# Altium PCB PCB1-C.PcbDoc (part 3 of 4)
Units mil, origin at the board's own origin, x right, y up, seen from the top; angles counter-clockwise.
Board outline 2476.38 x 3779.53 mil, 2 copper layers (Top Layer, Bottom Layer); 106 components, 105 nets, 404 pads, 256 vias.
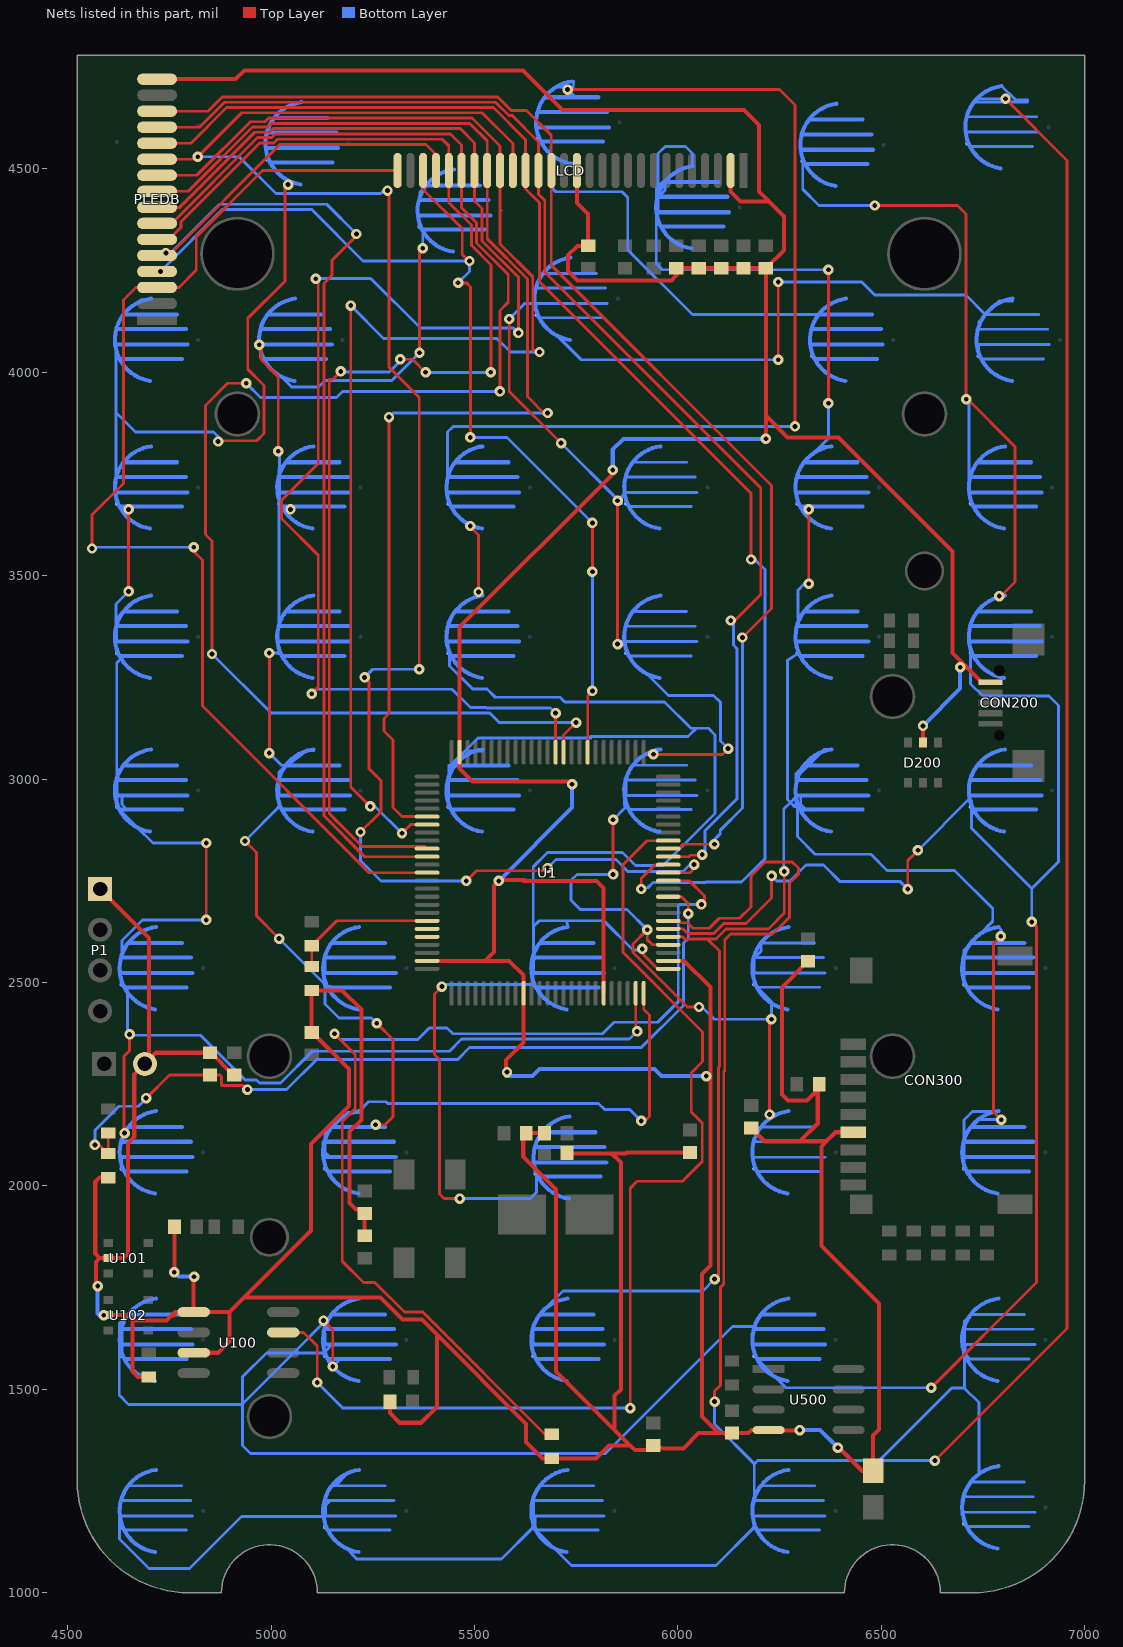
[diagram p3: the nets of this part, all layers, seen from the top]

## Footprints (in the part's own frame and the unit in brackets; to place one, negate y for a bottom-side part, rotate by r counter-clockwise, add the part's x,y. Pads: shape width x height; smd on the part's side, far side on the other; paste and mask are expansions set on the pad) (continued)
Button#44 [mil]
  round 10 smd: 1(120,0) 2(320,-40)
  Top Layer lines w10: 320.19,-12 319,-12 307.9,-12 303,-12 146,-12 ; 319,26 150,26 ; 312,-47 311.7,-47 295.1,-47 160,-47 ; 304,6 131.7,6 130.7,6 127,6 126,6 ; 303,62 301,62 195.54,62 172,62 ; 291,-30 131.7,-30 130.7,-30 127.7,-30 127,-30 ; 287,44 144.9,44 134,44 ; 268,-65 227.7,-65 149,-65 ; 238.02,-101.12 ccw(c222.55,-0.14) 313.67,-46.33 ccw(c222.55,-0.14) 314.37,-44.93 ccw(c222.55,-0.14) 324.6,4.7 ccw(c222.55,-0.14) 321.31,26 ccw(c222.55,-0.14) 320.19,29.92 ccw(c222.55,-0.14) 319,33.55 ccw(c222.55,-0.14) 309.5,53.5 ccw(c222.55,-0.14) 305.5,59.5 ccw(c222.55,-0.14) 276.18,86.82 ccw(c222.55,-0.14) 249.89,98.3 ccw(c222.55,-0.14) 235.89,101.15 ; 211.96,-101.38 cw(c223.45,0.14) 144.74,-65 cw(c223.45,0.14) 135.01,-51.01 cw(c223.45,0.14) 130.7,-42.7 cw(c223.45,0.14) 126,-30.53 cw(c223.45,0.14) 125.33,-28.33 cw(c223.45,0.14) 125.06,-27.36 cw(c223.45,0.14) 121.29,1.29 cw(c223.45,0.14) 121.46,6 cw(c223.45,0.14) 127,33.82 cw(c223.45,0.14) 128.95,38.95 cw(c223.45,0.14) 131.18,44 cw(c223.45,0.14) 208.82,101.24
Button#45 [mil]
  round 10 smd: 1(120,0) 2(320,-40)
  Top Layer lines w10: 320.19,-12 300.6,-12 298.3,-12 146,-12 ; 319,26 150,26 ; 312,-47 297.4,-47 160,-47 ; 304,6 134.5,6 130.5,6 127,6 126,6 ; 303,62 172,62 ; 291,-30 134.5,-30 130.5,-30 127,-30 ; 287,44 147,44 134,44 ; 268,-65 154.12,-65 149,-65 ; 238.02,-101.12 ccw(c222.55,-0.14) 313.33,-47 ccw(c222.55,-0.14) 317.11,-38.82 ccw(c222.55,-0.14) 319.29,-32.99 ccw(c222.55,-0.14) 324.43,-7.76 ccw(c222.55,-0.14) 322.08,22.92 ccw(c222.55,-0.14) 303.36,62.36 ccw(c222.55,-0.14) 235.89,101.15 ; 211.95,-101.38 cw(c223.45,0.14) 182.65,-93.53 cw(c223.45,0.14) 146.7,-67.3 cw(c223.45,0.14) 144.74,-65 cw(c223.45,0.14) 123,-18.5 cw(c223.45,0.14) 121.53,-6.97 cw(c223.45,0.14) 121.29,1.29 cw(c223.45,0.14) 121.46,6 cw(c223.45,0.14) 127,33.82 cw(c223.45,0.14) 128.95,38.95 cw(c223.45,0.14) 208.82,101.24
Button#46 [mil]
  round 10 smd: 1(120,0) 2(320,-40)
  Top Layer lines w7: 320.19,-12 319,-12 307.9,-12 146,-12 ; 319,26 150,26 ; 312,-47 296.3,-47 160,-47 ; 303,62 172,62
  Top Layer lines w10: 304,6 145.4,6 128.9,6 127,6 126,6 ; 291,-30 154.1,-30 146.9,-30 128.9,-30 127,-30 ; 287,44 143.1,44 134,44 ; 268,-65 149,-65 ; 238.02,-101.12 ccw(c222.55,-0.14) 313.33,-47 ccw(c222.55,-0.14) 320.19,29.92 ccw(c222.55,-0.14) 319,33.55 ccw(c222.55,-0.14) 305.5,59.5 ccw(c222.55,-0.14) 282.18,82.82 ccw(c222.55,-0.14) 235.89,101.15 ; 211.96,-101.38 cw(c223.45,0.14) 211.9,-101.37 cw(c223.45,0.14) 172.3,-88.3 cw(c223.45,0.14) 144.74,-65 cw(c223.45,0.14) 138.9,-57.21 cw(c223.45,0.14) 135.01,-51.01 cw(c223.45,0.14) 128.9,-38.56 cw(c223.45,0.14) 121.29,1.29 cw(c223.45,0.14) 121.46,6 cw(c223.45,0.14) 124.9,27.06 cw(c223.45,0.14) 126,30.81 cw(c223.45,0.14) 127,33.82 cw(c223.45,0.14) 128.95,38.95 cw(c223.45,0.14) 208.82,101.24
Button#47 [mil]
  round 10 smd: 1(120,0) 2(320,-40)
  Top Layer lines w10: 320.19,-12 320,-12 146,-12 ; 319,26 171.3,26 150,26 ; 312,-47 160,-47 ; 304,6 129.1,6 128.6,6 127,6 126,6 ; 303,62 301.6,62 300.49,62 172,62 ; 291,-30 130.9,-30 129.1,-30 127,-30 ; 287,44 142.8,44 134,44 ; 268,-65 149.1,-65 149,-65 ; 238.02,-101.12 ccw(c222.55,-0.14) 310.8,-51.6 ccw(c222.55,-0.14) 312,-49.49 ccw(c222.55,-0.14) 313.67,-46.33 ccw(c222.55,-0.14) 320,-30.81 ccw(c222.55,-0.14) 320.19,29.92 ccw(c222.55,-0.14) 320,30.53 ccw(c222.55,-0.14) 319,33.55 ccw(c222.55,-0.14) 310.29,52.21 ccw(c222.55,-0.14) 308.48,55.12 ccw(c222.55,-0.14) 305.5,59.5 ccw(c222.55,-0.14) 241.26,100.3 ccw(c222.55,-0.14) 235.89,101.15 ; 211.96,-101.38 cw(c223.45,0.14) 144.6,-64.82 cw(c223.45,0.14) 141.6,-61 cw(c223.45,0.14) 135.01,-51.01 cw(c223.45,0.14) 129.1,-39.05 cw(c223.45,0.14) 121.46,6 cw(c223.45,0.14) 126,30.8 cw(c223.45,0.14) 127,33.82 cw(c223.45,0.14) 128.6,38.09 cw(c223.45,0.14) 128.95,38.95 cw(c223.45,0.14) 129.1,39.32 cw(c223.45,0.14) 208.82,101.24
Button#48 [mil]
  round 10 smd: 1(120,0) 2(320,-40)
  Top Layer lines w10: 320.19,-12 319,-12 146,-12 ; 319,26 150,26 ; 312,-47 160,-47 ; 304,6 140.2,6 127.7,6 127.15,6 127,6 126,6 ; 303,62 290.2,62 172,62 ; 291,-30 140.2,-30 127.7,-30 127,-30 ; 287,44 140.2,44 137.7,44 134,44 ; 268,-65 227.7,-65 165.2,-65 149,-65 ; 238.02,-101.12 ccw(c222.55,-0.14) 313.33,-47 ccw(c222.55,-0.14) 317.6,-37.6 ccw(c222.55,-0.14) 322.98,18.58 ccw(c222.55,-0.14) 322.08,22.92 ccw(c222.55,-0.14) 305.5,59.5 ccw(c222.55,-0.14) 235.89,101.15 ; 211.96,-101.38 cw(c223.45,0.14) 211.7,-101.35 cw(c223.45,0.14) 169.67,-86.73 cw(c223.45,0.14) 155.49,-76.15 cw(c223.45,0.14) 144.74,-65 cw(c223.45,0.14) 135.01,-51.01 cw(c223.45,0.14) 127.7,-35.49 cw(c223.45,0.14) 127,-33.55 cw(c223.45,0.14) 121.99,-11.79 cw(c223.45,0.14) 121.89,-10.9 cw(c223.45,0.14) 121.29,0 cw(c223.45,0.14) 123.75,22.45 cw(c223.45,0.14) 127,33.82 cw(c223.45,0.14) 128.95,38.95 cw(c223.45,0.14) 208.82,101.24
Button#49 [mil]
  round 10 smd: 1(120,0) 2(320,-40)
  Top Layer lines w7: 320.19,-12 146,-12 ; 319,26 150,26 ; 312,-47 307,-47 306.7,-47 160,-47 ; 303,62 172,62
  Top Layer lines w10: 304,6 143.2,6 131.7,6 130.7,6 127,6 126,6 ; 291,-30 138.2,-30 131.7,-30 130.7,-30 127,-30 ; 287,44 152.7,44 140.2,44 134,44 ; 268,-65 149,-65 ; 211.96,-101.38 cw(c223.45,0.14) 211.7,-101.35 cw(c223.45,0.14) 144.74,-65 cw(c223.45,0.14) 135.01,-51.01 cw(c223.45,0.14) 130.7,-42.7 cw(c223.45,0.14) 127,-33.55 cw(c223.45,0.14) 122.28,-14.08 cw(c223.45,0.14) 121.7,-9.03 cw(c223.45,0.14) 121.35,3.65 cw(c223.45,0.14) 121.46,6 cw(c223.45,0.14) 121.7,9.31 cw(c223.45,0.14) 124.33,24.87 cw(c223.45,0.14) 124.82,26.75 cw(c223.45,0.14) 127,33.82 cw(c223.45,0.14) 128.95,38.95 cw(c223.45,0.14) 130.7,42.97 cw(c223.45,0.14) 130.73,43.03 cw(c223.45,0.14) 139.03,57.67 cw(c223.45,0.14) 207.22,101 cw(c223.45,0.14) 208.82,101.24 ; 324.71,-1.02 cw(c222.55,-0.14) 320.19,-30.19 ; 324.71,-1.02 cw(c222.55,-0.14) 320.19,-30.19 ; 324.71,-1.02 cw(c222.55,-0.14) 320.19,-30.19 ; 324.71,-1.02 cw(c222.55,-0.14) 320.19,-30.19 ; 324.71,-1.02 ccw(c222.55,-0.14) 319,33.55 ; 324.71,-1.02 ccw(c222.55,-0.14) 319,33.55 ; 324.71,-1.02 ccw(c222.55,-0.14) 319,33.55 ; 324.71,-1.02 ccw(c222.55,-0.14) 319,33.55 ; 320.19,-30.19 cw(c222.55,-0.14) 318.51,-35.19 ; 320.19,-30.19 cw(c222.55,-0.14) 318.51,-35.19 ; 320.19,-30.19 cw(c222.55,-0.14) 318.51,-35.19 ; 320.19,-30.19 cw(c222.55,-0.14) 318.51,-35.19 ; 319,33.55 ccw(c222.55,-0.14) 305.5,59.5 ; 319,33.55 ccw(c222.55,-0.14) 305.5,59.5 ; 319,33.55 ccw(c222.55,-0.14) 305.5,59.5 ; 319,33.55 ccw(c222.55,-0.14) 305.5,59.5 ; 318.51,-35.19 cw(c222.55,-0.14) 315.6,-42.32 ; 318.51,-35.19 cw(c222.55,-0.14) 315.6,-42.32 ; 318.51,-35.19 cw(c222.55,-0.14) 315.6,-42.32 ; 318.51,-35.19 cw(c222.55,-0.14) 315.6,-42.32 ; 315.6,-42.32 cw(c222.55,-0.14) 313.33,-47 ; 315.6,-42.32 cw(c222.55,-0.14) 313.33,-47 ; 315.6,-42.32 cw(c222.55,-0.14) 313.33,-47 ; 315.6,-42.32 cw(c222.55,-0.14) 313.33,-47 ; 313.33,-47 cw(c222.55,-0.14) 266.77,-92.23 ; 313.33,-47 cw(c222.55,-0.14) 266.77,-92.23 ; 313.33,-47 cw(c222.55,-0.14) 266.77,-92.23 ; 313.33,-47 cw(c222.55,-0.14) 266.77,-92.23 ; 305.5,59.5 ccw(c222.55,-0.14) 235.89,101.15 ; 305.5,59.5 ccw(c222.55,-0.14) 235.89,101.15 ; 305.5,59.5 ccw(c222.55,-0.14) 235.89,101.15 ; 305.5,59.5 ccw(c222.55,-0.14) 235.89,101.15 ; 266.77,-92.23 cw(c222.55,-0.14) 260.73,-94.89 ; 266.77,-92.23 cw(c222.55,-0.14) 260.73,-94.89 ; 266.77,-92.23 cw(c222.55,-0.14) 260.73,-94.89 ; 266.77,-92.23 cw(c222.55,-0.14) 260.73,-94.89 ; 260.73,-94.89 cw(c222.55,-0.14) 238.02,-101.12 ; 260.73,-94.89 cw(c222.55,-0.14) 238.02,-101.12 ; 260.73,-94.89 cw(c222.55,-0.14) 238.02,-101.12 ; 260.73,-94.89 cw(c222.55,-0.14) 238.02,-101.12
Button#50 [mil]
  round 10 smd: 1(120,0) 2(320,-40)
  Top Layer lines w10: 320.19,-12 309.8,-12 303.7,-12 146,-12 ; 319,26 306.2,26 150,26 ; 312,-47 305,-47 160,-47 ; 304,6 132,6 131,6 127,6 126,6 ; 303,62 172,62 ; 291,-30 132,-30 131,-30 128.5,-30 127,-30 ; 287,44 143.8,44 134,44 ; 268,-65 231.26,-65 149,-65 ; 238.02,-101.12 ccw(c222.55,-0.14) 313.33,-47 ccw(c222.55,-0.14) 324.6,4.63 ccw(c222.55,-0.14) 324.4,7.8 ccw(c222.55,-0.14) 320.19,29.92 ccw(c222.55,-0.14) 303.64,62 ccw(c222.55,-0.14) 235.89,101.15 ; 211.96,-101.38 cw(c223.45,0.14) 144.74,-65 cw(c223.45,0.14) 135.01,-51.01 cw(c223.45,0.14) 131,-43.34 cw(c223.45,0.14) 126,-30.53 cw(c223.45,0.14) 125.33,-28.33 cw(c223.45,0.14) 124.75,-26.25 cw(c223.45,0.14) 121.29,1.29 cw(c223.45,0.14) 121.46,6 cw(c223.45,0.14) 127,33.82 cw(c223.45,0.14) 128.95,38.95 cw(c223.45,0.14) 131.18,44 cw(c223.45,0.14) 208.82,101.24
CON_16P_1.0MM [mm]
  rect 2.5x0.7 smd: 1(0,0)
  oval 2.5x0.7 smd: 2(0,-1) 3(0,-2) 4(0,-3) 5(0,-4) 6(0,-5) 7(0,-6) 8(0,-7) 9(0,-8) 10(0,-9) 11(0,-10) 12(0,-11) 13(0,-12) 14(0,-13) 15(0,-14) 16(0,-15)
HDR1X2 [mm] "Connector; Header; 2 Position"
  rect 1.5x1.5 hole 0.9: 1(0,0)
  round 1.5 hole 0.9: 2(2.54,0)
  silkscreen extent -1.27,-1.27 3.81,1.27
HDR1X4 [mm] "Connector; Header; 4 Position"
  rect 1.5x1.5 hole 0.9: 1(0,0)
  round 1.5 hole 0.9: 2(2.54,0) 3(5.08,0) 4(7.62,0)
  silkscreen extent -1.27,-1.27 8.89,1.27
J1-0603 [mm] "Chip Resistor, Body 1.6x0.8mm, IPC High Density"
  rect 0.7x0.9 smd: 1(-0.75,0) 2(0.75,0)
  silkscreen extent -0.2,-0.35 0.2,0.35, body extent -0.85,-0.48 0.85,0.48, height 0.9
LCD_28P [mm]
  rect 2.2x0.5 smd: 1(0,0)
  oval 2.2x0.5 smd: 2(0,-0.8) 3(0,-1.6) 4(0,-2.4) 5(0,-3.2) 6(0,-4) 7(0,-4.8) 8(0,-5.6) 9(0,-6.4) 10(0,-7.2) 11(0,-8) 12(0,-8.8) 13(0,-9.6) 14(0,-10.4) 15(0,-11.2) 16(0,-12) 17(0,-12.8) 18(0,-13.6) 19(0,-14.4) 20(0,-15.2) 21(0,-16) 22(0,-16.8) 23(0,-17.6) 24(0,-18.4) 25(0,-19.2) 26(0,-20) 27(0,-20.8) 28(0,-21.6)
SM8 [mm]
  rect 1.9x1.3 smd: 1(-2.75,-1.6) 2(2.75,-1.6) 3(2.75,1.6) 4(-2.75,1.6)
  silkscreen extent -4.44,-1.91 4.44,1.91
SO-8 [mil]
  oval 80x24 smd: 1(0,0) 2(0,-50) 3(0,-100) 4(0,-150) 5(220,-150) 6(220,-100) 7(220,-50) 8(220,0)
  silkscreen extent 60,-175 160,25
SOIC8 [mm]
  rect 2x0.5 smd: 1(0,0)
  oval 2x0.5 smd: 2(0,-1.27) 3(0,-2.54) 4(0,-3.81) 5(5,-3.81) 6(5,-2.54) 7(5,-1.27) 8(5,0)
  silkscreen extent 1.27,-4.44 3.68,0.64
SOT-23-5 [mm]
  rect 0.6x0.5 smd: 1(0,0) 2(0,-0.95) 3(0,-1.9) 4(2.5,-1.9) 5(2.5,0)
  silkscreen extent 0.63,-2.38 1.87,0.48
SOT-23-6 [mm]
  rect 0.6x0.5 smd: 1(0,0) 2(0,-0.95) 3(0,-1.9) 4(2.5,-1.9) 5(2.5,-0.95) 6(2.5,0)
  silkscreen extent 0.63,-2.38 1.87,0.48
TF-2 [mm]
  rect 1.4x1.2 smd: 0(-4.55,-7.75)
  rect 1.4x1.6 smd: 0(-4.55,6.85)
  rect 2.2x1.2 smd: 0(5.05,-7.75) 0(5.05,7.75)
  rect 1.6x0.7 smd: 1(-5.05,2.25) 2(-5.05,1.15) 3(-5.05,0.05) 4(-5.05,-1.05) 5(-5.05,-2.15) 6(-5.05,-3.25) 7(-5.05,-4.35) 8(-5.05,-5.45) 9(-5.05,-6.55)
  silkscreen extent -3.94,-6.88 9.47,6.86
USB-MICRO [mm]
  rect 0.35x1.5 smd: 1(-1.3,2.675) 5(1.3,2.675)
  rect 0.4x1.5 smd: 2(-0.65,2.675) 3(0,2.675) 4(0.65,2.675)
  round 0.7 hole 0.7 unplated: 6(-2.032,2.134) 7(2.032,2.134)
  rect 2x2 smd: 8(-3.95,0.3) 9(3.95,0.3)
  silkscreen extent -3.68,-3 3.75,-2

## Part data
BAT: "Header, 2-Pin"
C8 C9 C10 C11 C12 C13 C14 C15 C16 C17 C18 C100 C101 C102 C400 C401 C402 C403 C404 C405 C406 C407 C500: library part "Cap Semi", "Capacitor (Semiconductor SIM Model)"
C19: library part EC
L200: library part BEAD__FERRITE, "EMI Suppression Filters,2A,0805"
P1: "Header, 4-Pin"
PLEDB: "Header, 16-Pin"
R1 R6 R7 R12 R102 R103 R104 R105 R200 R201 R202 R300 R301 R302 R303 R304 R500: library part Res3, "Resistor"
U1: "ARM Cortex-M3 Microcontroller"
U500: library part W25X16
X3: library part MC306

## Free pads (board coordinates)
  round 112.2 hole 98.43: 0(4917.32,3897.64) 0(4996.06,1433.07) 0(4996.06,2318.9) 0(6527.56,2318.9) 0(6527.56,3203.07) 0(6606.3,3897.64)
  round 183.07 hole 169.29: 0(4917.32,4291.34) 0(6606.3,4291.34)
  round 96.46 hole 82.68: 0(4996.06,1874.02) 0(6606.3,3511.81)

## Via types
v1: diameter 25.59, hole 11.81, Top Layer to Bottom Layer, tented both sides, 253 vias
v2: diameter 39.37, hole 39.37, Top Layer to Bottom Layer, tented both sides, 2 vias
v3: diameter 25.59, hole 11.81, Top Layer to Bottom Layer, 1 vias

## Nets (pads, with @x,y where several pads share a name; then routed paths per layer and width w, separated by ;. In a path a pad name is that pad's centre, name@x,y a point inside that pad or via, vN(x,y) a via of type N, cw(c..) or ccw(c..) an arc to the next point about the centre after c; other vN are vias at no path point)
ADC12_IN8: C102.2 R104.2 R105.1 U1.35 | length 2056.4
  Top Layer w7: v1(4567,2101) 4578.53,2101 R104.2@4600,2079.53 R105.1@4600,2130.47 ; v1@4693.5,2215.5 4750.44,2272.44 C102.2@4850,2272.44 4875,2272.44 4878,2269.44 4878,2248 4879,2247 4932,2247 v1(4942,2237) ; U1.35@5976.26,2710.94 6009.06,2710.94 6025.5,2694.5 v1(6025.5,2669.5)
  Bottom Layer w7: v1(4567,2101) 4567,2137 4626,2196 4674,2196 v1@4693.5,2215.5 ; v1(4942,2237) 5038.29,2237 5112.29,2311 5458.87,2311 5487.9,2340.03 5910.25,2340.03 6014,2443.78 6014,2597.5 6025.5,2609 v1(6025.5,2669.5)
  other v1: 4693,2216
BOOT0: R6.1 R7.2 U1.94 | length 360.1
  Top Layer w7: R7.2@5100,2539.53 R6.1@5100,2590.47 5161.42,2651.89 U1.94@5383.74,2651.89
BOOT1: R12.1 U1.37 | length 2608.5
  Top Layer w7: v1(5156,2374) 5207,2323 5207,2190.49 5175,2158.49 5175,1815 5227.15,1762.85 5255.15,1762.85 5328,1690 5373,1690 5673.47,1389.53 R12.1@5690,1389.53 ; U1.37@5976.26,2750.32 6028,2750.32 6065.3,2713.02 6065.3,2699.3 v1(6058,2692)
  Bottom Layer w7: v1(5156,2374) 5170,2360 5360.7,2360 5389,2388.3 5432.8,2388.3 5447.09,2374 5815,2374 5843.3,2402.3 5950.5,2402.3 6001,2452.8 6001,2688.8 6004.2,2692 v1(6058,2692)
CHRG: U1.42 U100.7 | length 2696.5
  Top Layer w7: U100.7@5030,1640 5080,1640 5113.5,1606.5 v1(5113.5,1517) ; v1(5883,1454) 5883,1994.5 5900,2011.5 6011.5,2011.5 6060,2060 6060,2154.46 6033,2181.46 6033,2277.62 6061,2305.62 6061,2378.38 5865.04,2574.34 5865.04,2789.78 5924,2848.74 U1.42@5976.26,2848.74
  Bottom Layer w7: v1(5113.5,1517) 5176.5,1454 v1(5883,1454)
FSMC_A16: LCD.26 PLEDB.4 U1.58 | length 2597.2
  Top Layer w7: LCD.26@5374.01,4496.06 5374.01,4449.61 5470,4353.62 5470,4290 5486.36,4273.64 v1(5487.89,4273.64) ; v1(5460,4220) 5480,4220 5490,4210 v1(5490,3840) ; U1.58@5778.43,3039.43 U1.58@5778.43,3066.26 5778.43,3205.43 v1(5790,3217) ; v1(5790,3510) v1(5790,3630)
  Bottom Layer w7: v1(4728.11,4248.11) 4880,4400 5100,4400 5226.36,4273.64 v1(5487.89,4273.64) 5487.89,4247.89 v1(5460,4220) ; v1(5490,3840) 5580,3840 v1(5790,3630) ; v1(5790,3217) v1(5790,3510)
FSMC_D0: LCD.23 PLEDB.7 U1.61 | length 3948.1
  Top Layer w7: PLEDB.7@4720,4366.22 4756.22,4366.22 4967,4577 5001.74,4577 5010.74,4586 5441,4586 5468.5,4558.5 LCD.23@5468.5,4496.06 5468.5,4404.5 5505.5,4367.5 5505.5,4317.73 5583.16,4240.07 5583.16,4172.45 5562.7,4152 v1(5562.7,3953) ; v1(4855,3307.73) 4855,3585 4838.7,3601.3 4838.7,3918.7 4893,3973 v1(4939,3973) ; U1.61@5719.37,3066.26 5719.37,3108.37 v1(5750,3139)
  Bottom Layer w7: v1(4855,3307.73) 5000.43,3162.3 5355.41,3162.3 5356.12,3163 5523.91,3163 5524.62,3162.3 5537.7,3162.3 5561,3139 v1(5750,3139) ; v1(4939,3973) 4973.88,3938.12 5161.02,3938.12 5175.9,3953 v1(5562.7,3953)
FSMC_D1: LCD.22 PLEDB.8 U1.62 | length 3809.5
  Top Layer w7: PLEDB.8@4674.41,4405.59 PLEDB.8@4720,4405.59 4775.59,4405.59 4960,4590 4996.35,4590 5005.35,4599 5465,4599 5500,4564 LCD.22@5500,4496.06 5500,4421.31 5518.5,4402.81 5518.5,4323.12 5608,4233.62 v1(5608,4097) ; v1(5100,3210) 5116,3226 5116,3550.41 5025.7,3640.7 5025.7,3685.7 5116,3776 v1@5116,4231 ; U1.62@5699.68,3066.26 v1(5699.68,3162.32)
  Bottom Layer w7: v1@5098.25,3208.25 5111,3221 5445.3,3221 5490.3,3176 5529.3,3176 5530,3175.3 5686.7,3175.3 v1(5699.68,3162.32) ; v1@5116,4231 5245,4231 5367.3,4108.7 5594.94,4108.7 5595.62,4109.38 v1(5608,4097)
  other v1: 5110,4230
FSMC_D2: LCD.21 PLEDB.9 U1.81 | length 3135.4
  Top Layer w7: PLEDB.9@4685.04,4444.96 PLEDB.9@4720,4444.96 4796.58,4444.96 4954.62,4603 4990.97,4603 4999.97,4612 5488.62,4612 5531.5,4569.12 LCD.21@5531.5,4496.06 5531.5,4328.5 5630.3,4229.7 5630.3,3940.24 5675,3895.53 5675,3895 v1(5680,3900) ; v1(5290,3890) 5290,3161.53 5277.7,3149.24 5277.7,3118.47 5299.59,3096.58 5299.59,2930.41 5322.2,2907.8 U1.81@5383.74,2907.8
  Bottom Layer w7: v1(5290,3890) 5300,3900 v1(5680,3900)
FSMC_D3: LCD.20 PLEDB.10 U1.82 | length 3450.8
  Top Layer w7: PLEDB.10@4691.01,4484.33 PLEDB.10@4720,4484.33 4817.56,4484.33 4949.23,4616 4985.58,4616 4994.58,4625 5494,4625 5562.99,4556.01 LCD.20@5562.99,4496.06 5562.99,4315.39 5643.3,4235.09 5643.3,4056.7 5650,4050 v1(5660,4050) ; v1@5196,4166.01 v1(5196,4164) 5196,2981 v1(5244,2933) ; v1(5322,2867) 5343.11,2888.11 U1.82@5383.74,2888.11
  Bottom Layer w7: v1(5196,4164) 5276.7,4083.3 5555.09,4083.3 5588.38,4050 v1(5660,4050) ; v1(5244,2933) 5256,2933 v1(5322,2867)
FSMC_D4: LCD.19 PLEDB.11 U1.38 | length 4358.7
  Top Layer w7: PLEDB.11@4720,4523.7 4813.7,4523.7 v1(4820,4530) 4928,4638 5519,4638 5594.49,4562.51 LCD.19@5594.49,4496.06 ; v1(5220,2870) 5270,2920 5270,2996.21 5240.7,3025.5 5240.7,3239.3 v1(5230,3250) ; v1(5286.3,4446.83) 5283.17,4446.83 5290,4440 5290,4012.58 5364.35,3938.24 v1(5364.35,3270) ; v1(5480,2750) 5504.8,2774.8 v1@5686.33,2774.8 ; U1.38@5976.26,2770 6030,2770 6040,2780 v1(6040,2790) v1@6040,2800
  Bottom Layer w7: v1(4820,4530) 4921.29,4530 5012.09,4439.2 5051.23,4439.2 5052.03,4440 5270,4440 5279.41,4449.41 5283.71,4449.41 v1(5286.3,4446.83) ; v1(5220,2870) 5220,2800 5270,2750 v1(5480,2750) ; v1(5230,3250) 5250,3270 v1(5364.35,3270) ; v1@5686.33,2774.8 5680,2781.12 v1(5680,2781.62) 5700.68,2802.3 5847.7,2802.3 5877,2773 6013,2773 v1@6040,2800
FSMC_D5: LCD.18 PLEDB.12 U1.39 | length 3406.9
  Top Layer w7: PLEDB.12@4720,4563.07 4803.07,4563.07 4891,4651 5546.5,4651 5625.98,4571.52 LCD.18@5625.98,4496.06 5625.98,4451 5660,4416.98 5660,4222.6 6180,3702.6 6180,3549 v1@6191,3538 ; v1@5910,2733 5910,2756 5943.69,2789.69 U1.39@5976.26,2789.69
  Bottom Layer w7: 5926,2733 5938.61,2745.61 6067.41,2745.61 6068.8,2747 6156.76,2747 6214,2804.24 6214,3515 v1@6191,3538
  other v1: 5910,2730 6180,3540
FSMC_D6: LCD.17 PLEDB.13 U1.40 | length 3146
  Top Layer w7: PLEDB.13@4720,4602.44 4824.06,4602.44 4885.62,4664 5551.88,4664 5584.98,4630.91 5593,4630.91 5657.48,4566.43 LCD.17@5657.48,4496.06 5657.48,4437.89 5673,4422.37 5673,4247 6204,3716 6204,3454 6140,3390 v1(6130,3390) ; U1.40@5976.26,2809.37 6027.84,2809.37 6031.47,2813 6058.32,2813 v1(6060,2814.68)
  Bottom Layer w7: v1(6060,2814.68) 6067,2821.68 6067,2873.12 6145.8,2951.91 6145.8,3320.47 6136.5,3329.77 6136.5,3383.5 v1(6130,3390)
FSMC_D7: LCD.16 PLEDB.14 U1.41 | length 3169.9
  Top Layer w7: PLEDB.14@4720,4641.81 4845.04,4641.81 4880.23,4677 5557.27,4677 5590.36,4643.91 5627.99,4643.91 5688.98,4582.92 LCD.16@5688.98,4496.06 5688.98,4263.02 6230,3722 6230,3419.5 v1(6158.8,3348.3) ; U1.41@5976.26,2829.06 6002.56,2829.06 6013.51,2840 v1(6090,2840)
  Bottom Layer w7: v1@6080,2840 6080,2841.62 6104.3,2865.91 6104.3,2874.3 6158.8,2928.8 v1(6158.8,3348.3)
FSMC_NE1: LCD.28 PLEDB.3 U1.88 | length 2901
  Top Layer w7: v3(4560,3567) 4560,3650 4637.03,3727.03 4637.03,4177.99 4667.77,4208.74 PLEDB.3@4720,4208.74 4773.74,4208.74 4816.29,4251.29 4816.29,4333.19 4979.16,4496.06 LCD.28@5311.02,4496.06 LCD.28@5311.02,4463 ; v1(4810,3570) 4810,3560 4831.3,3538.7 4831.3,3179.62 5240.92,2770 U1.88@5383.74,2770
  Bottom Layer w7: v3@4560,3570 v1(4810,3570)
FSMC_NOE: LCD.24 PLEDB.6 U1.85 | length 3215.5
  Top Layer w7: PLEDB.6@4720,4326.85 4748.99,4326.85 4778.71,4356.58 4778.71,4370.33 4972.38,4564 5007.12,4564 5016.12,4573 5421,4573 5437.01,4556.99 LCD.24@5437.01,4496.06 5437.01,4417.61 5492.5,4362.12 5492.5,4312.35 5540.61,4264.24 5540.61,4000.61 v1(5540,4000) ; 5164.19,2894.19 5143,2915.38 5143,3983 5152.21,3983 v1(5171.51,4002.3) ; 5164.28,2894.19 5224.15,2834.32 5378.48,2834.32 U1.85@5383.74,2829.06 ; v1(5317.73,4032.26) 5347.73,4032.26 v1(5380,4000)
  Bottom Layer w7: v1(5171.51,4002.3) 5170,4000.79 5290.79,4000.79 5317.73,4027.73 v1(5317.73,4032.26) ; v1(5380,4000) v1(5540,4000)
FSMC_NWE: LCD.25 PLEDB.5 U1.86 | length 3156.1
  Top Layer w7: PLEDB.5@4720,4287.48 4748.99,4287.48 5021.51,4560 5381,4560 5405.51,4535.49 LCD.25@5405.51,4496.06 ; PLEDB.5@4740.26,4293.24 v1(4741.71,4293.24) ; v1(5210,4340) 5210,4335.59 5150,4275.59 5150,4238.47 5130,4218.47 5130,2910 5230.63,2809.37 U1.86@5383.74,2809.37
  Bottom Layer w7: v1(4741.71,4293.24) 4753.24,4293.24 4873,4413 5137,4413 v1(5210,4340)
GND: BAT.2 C8.2 C9.2 C10.2 C11.2 C12.2 C13.2 C14.1 C15.2 C16.2 C17.2 C18.2 C19.2 C100.1 C101.1 C102.1 C400.1 C401.1 C402.1 C403.1 C404.1 C407.1 C500.2 CON200.5 CON300.6 D200.2 L200.2 LCD.2 LCD.14 P1.1 PLEDB.16 R7.1 R12.2 R103.1 R104.1 U1.10 U1.20 U1.27 U1.74 U1.99 U100.1 U100.3 U101.2 U102.2 U500.4 | length 19677.3
  Top Layer w10: v1(4574,1754) 4572,1754 4570,1756 4570,1813.6 4579,1822.6 ; P1.1@4580,2730 4700,2610 BAT.2@4700,2310 ; v1(4589,1682) U102.2@4596.9,1682 ; U102.2@4600,1682.6 4620,1682.6 ; R104.1@4600,2020.47 4579,2020.47 4568,2009.47 4568,1833.6 4579,1822.6 ; 4621.31,1683.91 4620,1682.6 ; R103.1@4700,1530.47 4673,1530.47 4659.06,1544.42 4659.06,1674.66 ; PLEDB.16@4720,4720.55 4913,4720.55 4934.45,4742 5620,4742 5717,4645 6162.5,4645 6200,4607.5 6200,4444 6224,4420 ; 4760.17,1682 4768.17,1690 ; v1@4762.44,1788 C14.1@4762.44,1900 ; U100.3@4782,1590 U100.3@4810,1590 4870,1590 4898,1618 4898,1690 ; v1(4811,1777) 4810,1776 U100.1@4810,1690 ; C101.1@4910,2272.44 4907.12,2272.44 4852,2327.56 C102.1@4850,2327.56 4717.56,2327.56 BAT.2@4700,2310 ; C10.2@5100,2377.56 R7.1@5100,2480.47 5175,2480.47 5222,2433.47 5222,2162.47 5193,2133.47 5193,1958.5 5209.06,1942.44 5230,1942.44 C17.2@5230,1932.44 C18.2@5230,1877.56 ; C10.2@5108.75,2370.25 5192,2287 5192,2197 5098,2103 5098,1890 4934,1726 ; C100.1@5292.44,1470 5292.44,1441.56 5316,1418 5369,1418 5408,1457 5408,1634.49 ; U1.99@5383.74,2553.46 5526.46,2553.46 ; v1@5578,2280 5578,2310 5620.94,2352.94 U1.10@5620.94,2473.74 5620.94,2518.06 5585.54,2553.46 5526.46,2553.46 ; 5620.94,2750 5800,2750 5817.8,2732.2 U1.20@5817.8,2473.74 ; 5623.44,2752.5 5562.5,2752.5 v1(5560,2750) 5548,2738 5548,2575 5526.46,2553.46 ; C19.2@5662.44,2130 C15.2@5627.56,2130 5620,2130 5620,2072.91 5701,1991.91 5701,1544.44 5844.72,1400.72 ; C16.2@5717.56,2080 5837.5,2080 ; v1(5740,2987.7) 5740,2990 5735.34,2994.66 5495.34,2994.66 5463.46,3026.54 U1.74@5463.46,3066.26 5463.46,3373.46 v1@5845,3755 ; LCD.14@5751.97,4496.06 5751.97,4416.56 5779.53,4389 C407.1@5779.53,4311.02 5753,4311.02 5730,4288.02 5730,4249 5753,4226 5984.56,4226 5996.06,4237.5 C404.1@5996.06,4255.91 C403.1@6051.18,4255.91 C402.1@6106.3,4255.91 C401.1@6161.42,4255.91 C400.1@6216.54,4255.91 ; C12.2@5925.75,1362.44 C12.2@5940,1362.44 ; U1.27@5976.26,2553.46 6015.54,2553.46 6080,2489 6080,1805.09 6059,1784.09 6059,1433.44 6100,1392.44 ; C11.2@6030,2082.44 5874.44,2082.44 5872,2080 5837.5,2080 ; LCD.2@6129.92,4496.06 6129.92,4444 6153.92,4420 6224,4420 ; C8.2@6180,2142.44 6212.44,2110 6300,2110 ; v1(6216.54,3836.54) 6216.54,3893.51 ; v1@6298.66,1399 6253,1399 6253,1400 U500.4@6223.15,1400 6181.56,1400 6174,1392.44 C500.2@6133.15,1392.44 6100,1392.44 ; C9.2@6320,2552.44 6256,2488.44 6256,2225 6271,2210 6318,2210 C13.2@6343.92,2235.92 ; 6343.92,2153.64 6343.92,2153.92 ; v1(6393.44,1356.56) 6396.56,1356.56 6453.13,1300 L200.2@6480,1300 6480,1387 6494.87,1401.87 6494.87,1710.54 6353,1852.41 6353,2097.55 6365.45,2110 ; CON300.6@6431.18,2132.05 6387.5,2132.05 6365.45,2110 ; D200.2@6602.6,3090 v1(6602.6,3131) ; v1(6694,3275) 6710.5,3275 ; CON200.5@6768.7,3238.5 6747,3238.5 6710.5,3275 ; 4579,1822.6 U101.2@4600,1822.6 4637.5,1822.6 4648,1833.1 4648,2104.35 4663.8,2120.14 4663.8,2273.8 BAT.2@4690,2300 BAT.2@4700,2310 ; 4620,1682.6 4651.11,1682.6 4659.06,1674.66 ; 4659.06,1674.66 4664.71,1669 4743.34,1669 4764.34,1690 4768.17,1690 ; 4768.17,1690 U100.1@4810,1690 ; U100.1@4810,1690 4898,1690 ; 4898,1690 4934,1726 ; 4934,1726 5269,1726 5323.25,1671.75 5370.74,1671.75 5408,1634.49 ; 5408,1634.49 5627,1415.49 5627,1371 5667.53,1330.47 R12.2@5690,1330.47 5799,1330.47 5830.97,1362.44 5883,1362.44 ; 5837.5,2080 5860,2057.5 5860,1500 5844.72,1484.72 5844.72,1400.72 ; 5844.72,1400.72 5883,1362.44 ; 5883,1362.44 5894.44,1351 5928.56,1351 C12.2@5940,1362.44 ; C12.2@5940,1362.44 5965.94,1355.2 6013.76,1355.2 6051,1392.44 6100,1392.44 ; 6216.54,3893.51 C400.1@6216.54,4255.91 ; 6216.54,3893.51 6270.04,3840 6395,3840 6675,3560 6675,3310.5 6710.5,3275 ; C400.1@6216.54,4255.91 6260.63,4300 6260.63,4383.37 6224,4420 ; 6300,2110 6343.92,2153.92 ; 6300,2110 6365.45,2110 ; 6343.92,2153.92 C13.2@6343.92,2235.92 ; C13.2@6343.92,2235.92 6343.92,2246.36 C13.2@6347.56,2250 6347.56,2239.56 C13.2@6343.92,2235.92
  Bottom Layer w10: v1(4574,1754) 4574,1687 4579,1682 v1(4589,1682) ; v1(4762,1788) 4773,1777 v1(4811,1777) ; v1(5560,2750) 5740,2930 v1(5740,2987.7) ; v1@5578,2270 5642.47,2270 5659.77,2287.3 5942.7,2287.3 5960,2270 v1(6070,2270) ; v1(5840,3760) 5840,3810 5866.54,3836.54 v1(6216.54,3836.54) ; v1(6299.66,1400) 6350,1400 v1(6393.44,1356.56) ; v1(6602.6,3131) 6694,3222.4 v1(6694,3275)
  other v1: 5580,2280
I2C1_SCL: U1.95
I2C1_SDA: U1.96
KI_0: KEY1.2 KEY8.2 KEY15.2 KEY22.2 KEY29.2 KEY36.2 KEY43.2 U1.24 | length 6702.3
  Top Layer w7: v1(4640,2130) 4638.7,2131.3 4638.7,2318.7 4652.5,2332.5 v1(4652.5,2372.5) ; v1(4650,3461.5) v1(4650,3663) ; v1(4841,2654) v1(4841,2843) ; v1(4870,3830) 4878,3830 4880,3832 4965,3832 4983,3850 4983,3967.5 4943,4007.5 4943,4133 5034,4224 5034,4453.5 v1(5042,4461.5) ; U1.24@5896.54,2473.74 5896.54,2383.46 v1(5900,2380)
  Bottom Layer w7: 4619,3740.25 4619,4056.48 ; 4620,3900 4667,3853 4859,3853 4880,3832 4878,3830 v1(4870,3830) ; 4620.81,2960 4620.81,3001.92 4620.81,3285.81 4631.4,3296.4 4638,3303 ; 4620.81,3338 4620.81,3338.99 ; KEY22.2@4621,3310 4627.33,3303.67 4628,3303 4629,3303 4637.5,3303 4638,3303 ; 4621,3705.99 4795,3705 ; 4622,2998 4622,2960 4622,2938.18 KEY29.2@4622,2932 ; 4622,3376 4622,3383.55 4622,3396 ; KEY29.2@4624.39,2932 KEY29.2@4622,2932 ; 4629,2925 4626.35,2927.65 KEY29.2@4622,2932 ; 4632.51,2070.7 4632.51,2052.51 4632.51,2043.89 KEY43.2@4633.7,2042.7 ; 4632.51,2523.4 4632.7,2523.21 ; KEY43.2@4632.7,2042.7 KEY43.2@4633.7,2042.7 ; 4632.7,2504.59 KEY36.2@4632.7,2495.4 KEY36.2@4633.7,2496.4 ; 4632.7,2523.4 4632.7,2523.21 ; 4633.7,2501.58 KEY36.2@4633.7,2496.4 ; 4633.7,2523.4 4633.7,2522.21 4632.7,2523.21 ; 4633.7,2561.4 4633.7,2568.95 4633.7,2603.7 4684,2654 v1(4841,2654) ; KEY43.2@4636.09,2042.7 KEY43.2@4633.7,2042.7 ; 4638,3034 4635.5,3031.5 4621,3017 4621,3002.53 4621,2960 4621,2941.19 KEY29.2@4621,2932 ; v1(4640,2130) v1@4645,2130 ; 4640,3743 4791,3743 ; 4640.7,2035.7 4638.05,2038.35 KEY43.2@4633.7,2042.7 ; 4640.7,2488.4 4638.05,2491.05 4633.7,2495.4 KEY36.2@4633.7,2496.4 ; 4647,2475.91 v1@4647,2372.5 ; 4650,2523.4 4806.7,2523.4 ; v1(4650,3461.5) 4619,3430.5 4619,3373.25 4619,3339 4620.81,3338.99 ; v1(4650,3663) v1@4657,3670 ; v1@4650,3670 v1@4657,3670 ; 4650,3779 4769,3779 ; v1(4652.5,2372.5) v1@4647,2372.5 ; 4769,3412 4678.5,3412 4638,3412 ; 4781,2925 4646,2925 4633.5,2937.5 4633.5,2956 4637.5,2960 4795,2960 ; 4781,3303 4638,3303 ; 4781,3670 v1@4657,3670 ; 4795,3338 4620.81,3338.99 ; v1(4841,2843) 4710,2843 4672.26,2880.74 4627.33,2925.67 KEY29.2@4621,2932 ; 4999.02,4515.99 5019,4515.99 ; 5008.02,4624.99 5139.02,4624.99 ; v1(5900,2380) 5881,2361 5468.32,2361 5438.52,2331.2 5101.26,2331.2 5023.35,2253.29 4971.56,2253.29 4964.66,2260.19 4936.81,2260.19 4826.41,2370.59 4648.91,2370.59 v1@4647,2372.5 ; 4620.81,3338.99 4620.81,3379.92 4620.81,3394.81 4622,3396 ; KEY29.2@4621,2932 KEY29.2@4622,2932 ; 4622,3396 4622,3396.5 4636.9,3411.4 4637.5,3412 4638,3412 ; 4622,3396 4635.5,3409.5 4638,3412
KI_1: KEY2.2 KEY9.2 KEY16.2 KEY23.2 KEY30.2 KEY37.2 KEY44.2 U1.25 | length 6687.4
  Top Layer w7: v1(4936,2848) 4964,2820 4964,2664.1 v1(5020,2608.1) ; v1@4975.08,4068 4975.08,4031.92 5018,3989 v1(5018,3806) ; v1(4995.89,3064) v1(4995.89,3310) ; v1(5257.16,2150.5) 5280.5,2150.5 5300,2170 5300,2360 v1(5260,2400) ; v1(5365,4048) 5365,4297 v1(5373.04,4305.04) ; v1(5910,2160) 5919.44,2160 5930,2170.56 5930,2420 5916.22,2433.78 U1.25@5916.22,2473.74
  Bottom Layer w7: v1(4936,2848) KEY30.2@5020,2932 5026.33,2925.67 5027,2925 ; v1(4995.89,3064) 5025.89,3034 5036.36,3034 5037,3034 ; v1(4995.89,3310) KEY23.2@5020,3310 ; v1(5018,3806) 5021,3803 5021,3763 ; 5019.81,2960 5019.81,3001.92 5019.81,3016.81 5034.5,3031.5 5037,3034 ; v1(5020,2608.1) KEY37.2@5132.7,2495.4 ; 5020,3370 KEY16.2@5019.81,3678.19 ; KEY16.2@5020,3677 KEY16.2@5021,3677 ; 5021,2998 5021,3005.55 5021,3015.5 5029.73,3024.23 5037.5,3032 5040.16,3034 ; KEY16.2@5023.39,3677 KEY16.2@5021,3677 ; 5025,3338 5194,3338 ; 5026.54,3988.74 5051.16,3964.12 5117,3964.12 5132.88,3980 5297,3980 v1(5365,4048) ; 5026.67,2925 5027,2925 ; 5028,3670 5025.35,3672.65 KEY16.2@5021,3677 ; 5032.5,3376 5190,3376 ; 5037,3779 5034.5,3776.5 5021,3763 ; 5037.5,3303 5180,3303 ; 5038.5,3412 5062.47,3435.97 5064,3437.5 5089,3450 5104.11,3451.15 ; 5039,3412 5168,3412 ; v1(5048,3663) 5055,3670 5180,3670 ; 5053,3794.5 5037.5,3779 5033.31,3774.81 5021,3762.5 ; 5104.11,3073.15 5104.11,3070 5089.05,3070 5088,3070 5087.31,3069.48 5040.16,3034 ; 5132.51,2070.7 5132.51,2082.99 ; 5132.51,2523.4 5132.51,2565.32 ; KEY44.2@5132.7,2042.7 5139.03,2036.37 5139.7,2035.7 5140.7,2035.7 5141,2035.7 ; 5133.7,2561.4 5133.7,2568.95 ; 5138.05,2491.05 5146,2491.05 5146,2488.4 ; 5138.33,2037.77 5138.33,2038 5140,2038 5140,2036.7 5141,2035.7 ; 5147.2,2594.9 5149.7,2597.4 ; 5149.7,2144.7 5147.2,2142.2 5133.7,2128.7 5133.7,2126.7 ; 5168,3034 5041,3034 5040.16,3034 ; 5180,2925 5028,2925 5027,2925 ; 5190,3743 5026,3743 5021,3738 ; 5194,3705 5022,3705 5021,3706 ; v1@5257.16,2147.16 v1(5257.16,2150.5) ; v1(5260,2400) 5247,2413 5167,2413 5132.7,2447.3 KEY37.2@5132.7,2495.4 ; 5292.7,2035.7 5157.6,2035.7 5141,2035.7 ; 5292.7,2488.4 5146,2488.4 ; 5302.7,2108.7 5133.7,2108.7 ; 5306.7,2070.7 5149.7,2070.7 5144.8,2070.7 5132.51,2082.99 ; KEY2.2@5365.04,4357.64 KEY2.2@5368.43,4357.64 ; 5366.04,4423.64 5366.04,4431.19 5366.04,4443.64 5379.54,4457.13 5382.04,4459.64 ; v1(5373.04,4305.04) 5373.04,4348.15 5373.04,4350.64 ; v1(5910,2160) 5882,2188 5820.38,2188 5805.38,2203 5287,2203 5283,2207 5239.96,2207 5216.81,2183.85 5216.81,2181 5202.81,2181 5188,2181 5176.52,2169.52 5151.7,2144.7 5143.2,2136.2 5133.7,2126.7 ; KEY16.2@5019.81,3678.19 5019.81,3686.81 5019.81,3705 5019.81,3746.92 5019.81,3761.81 5021,3763 ; KEY16.2@5019.81,3678.19 KEY16.2@5021,3677 ; KEY16.2@5021,3677 5021,3683.18 5021,3705 5021,3706 ; 5021,3706 5021,3738 ; 5021,3738 5021,3743 5021,3750.55 5021,3762.5 ; 5021,3762.5 5021,3763 ; 5037,3034 5040.16,3034 ; 5132.51,2082.99 5132.51,2108.7 ; 5132.51,2082.99 5128.1,2087.4 5128,2087.5 5128,2107.7 5129,2108.7 5131.39,2108.7 5132.51,2108.7 ; 5132.51,2108.7 5133.7,2108.7 ; 5132.51,2108.7 5132.51,2112.62 5132.51,2125.51 5133.7,2126.7 ; KEY37.2@5132.7,2495.4 5139.03,2489.07 5139.7,2488.4 5140.7,2488.4 5146,2488.4 ; 5133.7,2108.7 5133.7,2116.25 5133.7,2126.7
  other v1: 4971.25,4068
KI_2: KEY3.2 KEY10.2 KEY17.2 KEY24.2 KEY31.2 KEY38.2 KEY45.2 U1.26 | length 10395.9
  Top Layer w7: v1(5420,2490) 5402,2472 5402,2323.28 5414,2311.28 5414,1980 5425,1969 v1(5464,1969) ; v1(5490,3622.3) 5490,3620 5510,3600 v1(5510,3460) ; v1(5729,4695) 6250,4695 6288,4657 v1(6288,3867) ; v1(5912.79,2582.79) 5912.79,2570.95 5949.96,2533.78 U1.26@5976.26,2533.78
  Bottom Layer w7: v1(5420,2490) 5425.4,2495.4 KEY38.2@5644.5,2495.4 ; 5434,3740.25 5434,3853 5448,3867 v1(6288,3867) ; 5435.81,2960 5435.81,2941.81 5435.81,2933.19 KEY31.2@5437,2932 ; KEY31.2@5436,2932 KEY31.2@5437,2932 ; 5438,3338 5610,3338 ; KEY24.2@5439,3308 5439,3278 5496.13,3220.87 5496.81,3221.55 5531.05,3221.55 5551.3,3201.3 5710.62,3201.3 5721.91,3190 5967,3190 6032,3125 6045.41,3125 ; KEY31.2@5439.39,2932 KEY31.2@5437,2932 ; 5444,2925 5441.35,2927.65 KEY31.2@5437,2932 ; 5450,3303 5596,3303 ; 5450,3376 5606,3376 ; 5463,3779 5584,3779 ; v1(5464,1969) 5637.2,1969 5652.89,1984.69 KEY45.2@5652.89,2031.18 ; 5472,3670 5596,3670 ; v1@5487.7,3620 v1(5490,3622.3) ; 5519.7,3100.7 5780.9,3100.7 5781.19,3101 ; 5520.11,3073.15 5520.11,3069 5501.8,3069 5488,3069 5473.82,3054.82 5453,3034 ; 5584,3034 5461.5,3034 5453,3034 ; 5644.31,2523.4 5644.5,2523.4 ; 5645.5,2561.4 5645.5,2568.95 5645.5,2581.4 5659,2594.9 5661.5,2597.4 ; 5651.17,2488.4 5651.5,2488.4 ; 5656.19,4603.17 5830.38,4602.17 ; 5667.17,4640.17 5826.38,4640.17 ; 5687.5,4554.67 5687.5,4536.33 5687.5,4456.5 5700,4444 5862.5,4444 5877,4429.5 5877,4301 6036,4142 6345.96,4142 ; 5700,4567.17 5816.38,4567.17 ; 5702,4701 5743,4701 5744,4715.33 5740.49,4715.33 ; 5728.61,2636.55 5729,2636.55 5728,2652 ; v1(5729,4695) 5747.83,4676.17 5804.38,4676.17 ; 5804.5,2488.4 5662.5,2488.4 5652.5,2488.4 5651.5,2488.4 ; 5814.5,2561.4 5727.6,2561.4 5651.4,2561.4 5646,2556 5646,2524.4 5647,2523.4 5666.5,2523.4 5818.5,2523.4 ; v1(5912.79,2582.79) 5910,2580 5890,2580 5818,2652 5728,2652 ; 6330.61,4106 6499.61,4106 ; 6337.61,4033 6489.61,4033 ; 6434.5,4142 6477.61,4142 ; KEY31.2@5437,2932 5437,2938.18 5437,2960 5437,2998 5437,3005.55 5437,3018 ; 5437,3018 5450.5,3031.5 5453,3034 ; 5437,3018 5437,3029 ; 5437,3029 5437,3033.5 5437.5,3034 5442,3034 ; 5437,3029 5442,3034 ; 5442,3034 5452.36,3034 5453,3034 ; 5442,3034 5509,3101 5781.19,3101 ; KEY38.2@5644.5,2495.4 5644.5,2504.59 5644.5,2523.4 ; KEY38.2@5644.5,2495.4 5650.83,2489.07 5651.5,2488.4 ; 5644.5,2523.4 5644.5,2565.93 5644.5,2784.5 5680,2820 5864,2820 5896.3,2787.7 5963.2,2787.7 6091.3,2915.8 6091.3,3108.7 6075,3125 6045.41,3125 ; 5644.5,2523.4 5645,2523.4 5645,2567.48 5645,2637.5 5659.5,2652 5728,2652 ; 5781.19,3101 5786,3101 5790,3105 ; 5781.19,3101 5785.19,3105 5790,3105 ; 5790,3105 6025.41,3105 6045.41,3125
  Bottom Layer w10: v1(5510,3460) v1@5519,3451
KI_3: KEY4.2 KEY11.2 KEY18.2 KEY25.2 KEY32.2 KEY39.2 KEY46.2 U1.29 | length 6184.7
  Top Layer w7: v1(5585.7,4131) 5585.7,3953.3 v1(5713,3826) ; v1(5841,2766) v1(5841,2900) ; v1(5852,3332) v1(5852,3684.19) ; v1(5940,3061) 6109.5,3061 v1(6123.5,3075) ; U1.29@5976.26,2592.83 5937.5,2592.83 5925,2605.33 v1(5925,2630) 5890.17,2595.17 5890.17,2573.88 6024.05,2440 v1@6062.3,2440 ; v1(6225.72,2175.72) 6225.72,2405.72 v1(6230,2410) ; v1(6247,4031) v1(6247,4222)
  Bottom Layer w7: v1(5585.7,4131) 5623.81,4169.1 5647.9,4169.1 ; 5662.5,4169.1 5826.44,4169.1 ; 5667.5,4207.1 5822.44,4207.1 ; 5694.1,4134.1 5812.44,4134.1 ; 5703.7,4089.84 5762.54,4031 v1(6247,4031) ; v1(5713,3826) v1@5853.4,3685.6 ; v1(5841,2766) 5751.8,2766 5737.5,2751.7 5737.5,2702.5 5760,2680 5875,2680 v1(5925,2630) ; v1(5841,2900) KEY32.2@5873,2932 5869,2936 5869,2959.82 ; v1(5852,3332) 5858,3338 5868.98,3338 5872.81,3338 ; v1(5852,3684.19) v1@5853.4,3685.6 ; v1@5862,3677 v1@5853.4,3685.6 ; 5869.43,3701.62 v1@5853.4,3685.6 ; 5872.81,2960 5872.81,2996.81 5874,2998 5874,3005.55 ; 5875,3338 6047,3338 ; 5878.35,2927.65 5881,2925 ; 5884.5,3376 6043,3376 ; 5888.5,3670 6033,3670 ; 5888.5,3705 6047,3705 ; 5890,3034 5910.82,3054.82 ; 5891,3412 6021,3412 ; 5892,3779 6021,3779 ; 5893,3303 6033,3303 ; 5920.53,3061 v1(5940,3061) ; 5924.26,3258.74 5977,3206 6087.5,3206 6104.64,3188.86 6104.64,3093.86 v1(6123.5,3075) ; v1@6062.3,2437.7 6090,2410 v1(6230,2410) 6230,2449.4 6230,2453.3 6194.9,2488.4 ; 6187.71,2523.4 6187.71,2565.32 ; KEY39.2@6187.9,2495.4 6194.23,2489.07 6194.9,2488.4 ; 6188.9,2561.4 6204.9,2577.4 6204.9,2597.4 ; 6195.9,2488.4 6194.9,2488.4 ; v1@6225.72,2165.52 v1(6225.72,2175.72) ; v1(6247,4222) 6452,4222 6484,4190 6708.06,4190 6755.69,4142.36 6756.06,4142 ; 6738.86,4068 6738.86,4049.81 6738.86,4041.19 KEY11.2@6740.06,4040 ; KEY11.2@6739.06,4040 KEY11.2@6740.06,4040 ; 6740.06,4106 6740.06,4113.55 6740.06,4125 6751.32,4136.27 6757.06,4142 6780.1,4165.05 6790.06,4175 6799.27,4175 6823,4175 6823.17,4181.15 ; KEY11.2@6742.44,4040 KEY11.2@6740.06,4040 ; 6747.06,4033 6744.41,4035.65 KEY11.2@6740.06,4040
  other v1: 6052,2440
KI_4: KEY5.2 KEY12.2 KEY19.2 KEY26.2 KEY33.2 KEY40.2 KEY47.2 U1.30 | length 8010.6
  Top Layer w7: U1.30@5976.26,2612.52 6011.49,2612.52 6016.51,2607.5 6072.46,2607.5 ; v1(6090.5,1771) 6100,1780.5 6100,2291.32 6102.38,2293.7 6102.38,2577.58 6072.46,2607.5 ; v1(6261.61,2773.2) 6261.61,2670.61 6223,2632 6118.55,2632 6094.05,2607.5 6072.46,2607.5 ; v1(6322,3480.5) v1(6322,3663) ; v1(6370,3924) v1(6370,4252) ; v1(6794,2614) 6776.01,2596.01 6776.01,2181.99 v1(6795,2163)
  Bottom Layer w7: 5644.31,1651.92 5644.31,1615.69 5650,1610 ; 5645.5,1648 5645.5,1655.55 ; 5651.17,1575 5652.5,1575 ; 5672.75,1697.02 5717.73,1742 6061.5,1742 v1(6090.5,1771) ; 5750,1684 5792.5,1684 ; 5951.46,4393.51 5951.46,4435.43 5951.46,4456.47 ; 5952.65,4431.51 5968.65,4447.51 5968.65,4467.51 ; 5958.32,4358.51 5959.65,4358.51 ; 6035.77,4506.66 6036,4506.66 6036,4537.5 6018.5,4555 5968.96,4555 5951.46,4537.5 5951.46,4456.47 ; 6099.65,4467.51 5968.65,4467.51 ; v1(6261.61,2773.2) 6260.2,2774.6 6260.2,2926.4 6276.65,2942.85 ; 6293.81,2960 6290.43,2956.62 6290,2956.19 ; 6293.81,3452.31 6295,3453.5 ; KEY26.2@6294.72,3308.28 6269.7,3292.2 6269.7,2949.8 6276.65,2942.85 ; 6295,2998 6295,3005.55 6295,3008 ; 6295,3338 6315,3338 6468,3338 ; 6295,3376 6464,3376 ; 6297,3705 6468,3705 ; KEY33.2@6297.39,2932 KEY33.2@6295,2932 ; 6301,3743 6464,3743 ; 6302,2925 6299.35,2927.65 KEY33.2@6295,2932 ; 6302,3303 6311,3303 6454,3303 ; 6305.34,3404.84 6312.5,3412 6442,3412 ; 6311,3034 6308.5,3031.5 6290,3013 6290,2983.91 6290,2959.82 6290,2956.19 ; 6311,3412 6308.5,3409.5 6295,3396 6295,3453.5 ; 6311,3779 6331.82,3799.82 6350,3818 ; v1@6312.5,3482 6295,3464.5 6295,3453.5 ; v1(6322,3663) 6329,3670 6454,3670 ; v1(6370,3924) 6370,3838 6350,3818 ; v1(6370,4252) 5962.5,4252 5947,4267.5 5947,4401.91 5947,4408.85 5947,4452.01 5951.46,4456.47 ; 6378.11,3073.15 6378.11,3073 6377,3073 6360,3073 6353.86,3066.86 6321,3034 ; 6378.11,3818.15 6378.11,3818 6377,3818 6350,3818 ; 6442,3034 6321,3034 ; 6454,2925 6314.5,2925 6302,2937.5 6302,2959 6303,2960 6468,2960 ; 6703.41,2070.7 6703.41,2112.62 6703.41,2125 6703.6,2125.19 ; 6703.41,2523.4 6703.41,2551.39 6700.65,2554.15 6700,2554.8 6700,2556.8 6701.52,2558.32 6703.6,2560.4 ; KEY47.2@6703.6,2042.7 6703.6,2051.89 6703.6,2070.7 6703.6,2113.23 6703.6,2125.19 ; KEY40.2@6703.6,2495.4 6703.6,2504.59 6703.6,2523.4 6703.6,2560.4 ; 6704.6,2108.7 6704.6,2116.25 6704.6,2126.19 ; 6704.6,2561.4 6703.6,2560.4 ; 6709.93,2036.37 6711.6,2034.7 ; 6709.93,2489.07 6708,2491 6708,2492 6708.5,2492 6711.6,2492 6711.6,2488.4 ; 6711.6,2035.7 6711.6,2034.7 ; 6720.6,2144.7 6718.1,2142.2 6704.6,2128.7 6704.6,2126.19 ; 6787.71,2183.85 6787.71,2183 6782.34,2183 6724.1,2183 6703.6,2162.5 6703.6,2125.19 ; 6787.71,2636.55 6794,2630.26 v1(6794,2614) ; v1(6795,2163) 6741.41,2163 6723.11,2144.7 6713.31,2134.91 6704.6,2126.19 ; 5951.46,4456.47 5962.5,4467.51 5968.01,4467.51 5968.65,4467.51 ; 6276.65,2942.85 6290,2956.19 ; 6276.65,2942.85 6287.5,2932 KEY33.2@6294,2932 ; 6290,2956.19 6290,2937 KEY33.2@6295,2932 ; KEY33.2@6294,2932 KEY33.2@6295,2932 ; KEY33.2@6294,2932 6294,2858.8 6337.5,2815.3 6474.98,2815.3 6514.42,2775.85 6680.37,2775.85 6774,2682.23 6774,2650.8 6741.42,2618.22 6720.6,2597.4 6718.1,2594.9 6703.6,2580.4 6703.6,2565.93 6703.6,2560.4 ; 6295,3008 6296.45,3009.45 6321,3034 ; 6295,3008 6295,3016.5 6305.34,3026.84 6312.5,3034 6321,3034 ; 6703.6,2125.19 6704.6,2126.19 ; 6711.6,2034.7 6711.6,2033.21 6711.6,2030 6711.65,2029.95 6712.8,2031.1 6713.5,2031.8 6713.5,2032.8 6711.6,2034.7
KI_5: KEY6.2 KEY13.2 KEY20.2 KEY27.2 KEY34.2 KEY41.2 KEY48.2 U1.31 | length 10961
  Top Layer w7: v1(5129,1669) 5151.75,1646.25 v1(5151.75,1556.25) ; U1.31@5976.26,2632.2 6012.79,2632.2 6024.49,2620.5 6088.47,2620.5 6112.97,2645 6167.8,2645 6230.49,2707.69 v1(6230.49,2762.28) ; v1(6484,4410) 6687.5,4410 6708,4389.5 6708,3938 6829,3817 6829,3485 v1@6792,3448 ; v1(6565,2729.83) 6565,2800 v1(6590,2825) ; v1(6623,1504) 6881.7,1762.7 6881.7,2637.3 v1(6870,2649)
  Bottom Layer w7: KEY48.2@4632.7,1582 4635.1,1584.4 4636.7,1586 4633.7,1589 4633.7,1610 4633.7,1648 ; 4639.37,1575 4640.7,1575 ; 4649.7,1684 4647.2,1681.5 4627,1661.3 4627,1486 4650,1463 4928.7,1463 4930,1464.3 ; v1(5129,1669) v1@5131.85,1666.15 ; 5132.51,1610 5132.51,1637.79 5129.72,1640.58 5129,1641.3 5129,1643.3 5130.62,1644.92 5133.7,1648 ; 5139.37,1575 5140.7,1575 5161,1575 ; 5149.7,1684 5147.2,1681.5 v1@5131.85,1666.15 ; v1(5151.75,1556.25) 5151.8,1556.3 5170.5,1575 5292.7,1575 ; 5302.7,1648 5150,1648 5136.14,1661.86 v1@5131.85,1666.15 ; 5306.7,1610 5150,1610 5132.7,1592.7 5132.7,1591.19 KEY41.2@5132.7,1582 5124.99,1589.71 5055.41,1589.71 ; 6187.71,1654.71 6134.71,1654.71 5822,1342 4950,1342 4930,1362 4930,1464.3 ; 6194.23,1575.67 6239.16,1530.74 6265.9,1504 v1(6623,1504) ; 6195,1610 6361.9,1610 ; 6203,1648 6357.9,1648 ; 6217,1684 6335.9,1684 ; v1(6230.49,2762.28) 6242.99,2749.78 6275.69,2749.78 6315.2,2789.3 6358,2789.3 6399.3,2748 6546.83,2748 v1(6565,2729.83) ; 6306.98,4525.24 6306.98,4450 6346.98,4410 v1(6484,4410) ; 6307,4585.06 6475.98,4585.06 ; 6321,4512.06 6465.98,4512.06 ; 6325,4547.06 6479.98,4547.06 ; 6325,4621.06 6453.98,4621.06 ; v1(6590,2825) 6717.2,2952.2 6722.24,2947.15 6722.24,2934.82 6722.24,2879.24 6870,2731.48 ; 6715.72,3726.28 v1@6715.72,3934 ; KEY27.2@6719.81,3310.19 6719.81,3234.19 6750,3204 6912.5,3204 6935.5,3181 6935.5,2796.98 6870,2731.48 ; 6721,3705.99 6894,3705 ; 6725,3338 6894,3338 ; 6733,3743 6890,3743 ; 6733.31,3407.81 6737.5,3412 6868,3412 ; 6734.5,3409.5 6737,3412 ; 6737.5,2960 6894,2960 ; 6762.5,2925 6880,2925 ; v1(6870,2649) 6870,2731.48 ; 4930,1464.3 4930,1531 4988.71,1589.71 5055.41,1589.71 ; 4930,1464.3 5055.41,1589.71 ; 5055.41,1589.71 v1@5131.85,1666.15
  Bottom Layer w10: 6737,3779 6737,3779.83
  other v1: 6790,3450 6709,3934
KI_6: KEY7.2 KEY14.2 KEY21.2 KEY28.2 KEY35.2 KEY42.2 KEY49.2 U1.32 | length 10897.2
  Top Layer w7: U1.32@5976.26,2651.89 6003,2651.89 6003,2647 6023.99,2647 6037.49,2633.5 6077.16,2633.5 6101.66,2658 6152,2658 6180,2686 6180,2762.11 6214.59,2796.7 6281.3,2796.7 6296.4,2781.6 6296.4,2766.4 6274.61,2744.61 6274.61,2660.61 6233,2619 6129.7,2619 6115.38,2604.68 6115.38,2283.08 6113,2280.7 6113,1759 6105,1751 6105,1510 6090.5,1495.5 v1(6090.5,1470) ; v1(6632,1325) 6957,1650 6957,4521 v1(6805.5,4672.5)
  Bottom Layer w7: 4627.99,1199.98 4627.99,1132.01 4700,1060 4800,1060 4927.81,1187.81 5128.83,1187.81 5133.7,1187.81 ; 4646,1154 4792.7,1154 ; KEY42.2@5132.7,1161 5133.7,1162 5133.7,1167.18 ; 5133.7,1227 5133.7,1215.2 ; 5138.05,1156.65 5140.7,1154 ; 5158,1263 5189.66,1294.66 ; 5183.96,1109.74 5210.7,1083 5566.5,1083 KEY35.2@5644.5,1161 ; 5302.7,1227 5145.5,1227 5133.7,1215.2 ; 5644.31,1189 5644.31,1170.81 5644.31,1162.19 KEY35.2@5645,1161.5 ; 5645.5,1227 5645.5,1189.5 5646,1189 5649,1186 5649,1165.5 5646.9,1163.4 KEY35.2@5645,1161.5 ; 5652.5,1154 5649.85,1156.65 KEY35.2@5645,1161.5 ; 5814.5,1227 5647,1227 5646,1226 5646,1190 5647,1189 5818.5,1189 ; v1(6090.5,1470) 6090,1469.5 6090,1414.92 6187.71,1317.21 ; 6187.71,1230.92 6187.71,1317.21 ; KEY28.2@6187.9,1161 6093.9,1067 5738.5,1067 5695.76,1109.74 5650.83,1154.67 KEY35.2@5644.5,1161 ; 6187.9,1231.53 6187.9,1312.5 ; 6206,1189 6361.9,1189 ; 6209,1154 6347.9,1154 ; 6218,1263 6335.9,1263 ; 6489.5,1325 6195.5,1325 6187.71,1317.21 ; v1(6632,1325) 6495,1325 6673.25,1503.25 6704.25,1503.25 6705,1502.5 ; 6703.41,1610 6702,1608.59 6702,1596.84 6702,1585 KEY14.2@6704.6,1582.4 ; KEY14.2@6703.6,1582 KEY14.2@6704.6,1582 ; 6704.6,1648 6704.6,1610 6704.6,1588.18 KEY14.2@6704.6,1582.4 ; 6706,1610 6706,1587.5 6718.5,1575 6732,1575 6739,1575 6863.6,1575 ; 6706,1648 6706,1659.32 6706,1668 6715.12,1677.12 6722,1684 6753,1684 6759,1684 6851.6,1684 ; KEY14.2@6706.99,1582 KEY14.2@6705,1582 ; 6711.6,1575 6708.95,1577.65 KEY14.2@6705,1581.6 ; 6718.1,1269.5 6720.6,1272 6740,1291.4 6740,1291.78 6740,1467.5 6705,1502.5 ; 6720.6,1684 6718.1,1681.5 6705,1668.4 6705,1656.67 6705,1648 6705,1610 6705,1587.06 KEY14.2@6705,1582 ; 6725,4590.36 6885.5,4590.36 ; 6728.5,4664.36 6736.63,4672.5 v1(6805.5,4672.5) ; 6795.61,4703.51 6795.61,4704 6796,4704 6830,4670 6859,4670 6859.5,4669.5 6859.5,4664.36 ; 5133.7,1187.81 5133.7,1189 5133.7,1215.2 ; 5133.7,1187.81 5132.51,1189 5132.51,1214.01 5133.7,1215.2 ; KEY35.2@5644.5,1161 KEY35.2@5645,1161.5 ; KEY14.2@6704.6,1582 KEY14.2@6705,1581.6 ; KEY14.2@6704.6,1582 KEY14.2@6705,1582 ; KEY14.2@6704.6,1582 KEY14.2@6704.6,1582.4 ; KEY14.2@6704.6,1582.4 KEY14.2@6705,1582 ; 6705,1502.5 KEY14.2@6705,1581.6 ; KEY14.2@6705,1581.6 KEY14.2@6705,1582